# EAGLE board all_brds (EAGLE 5.10)
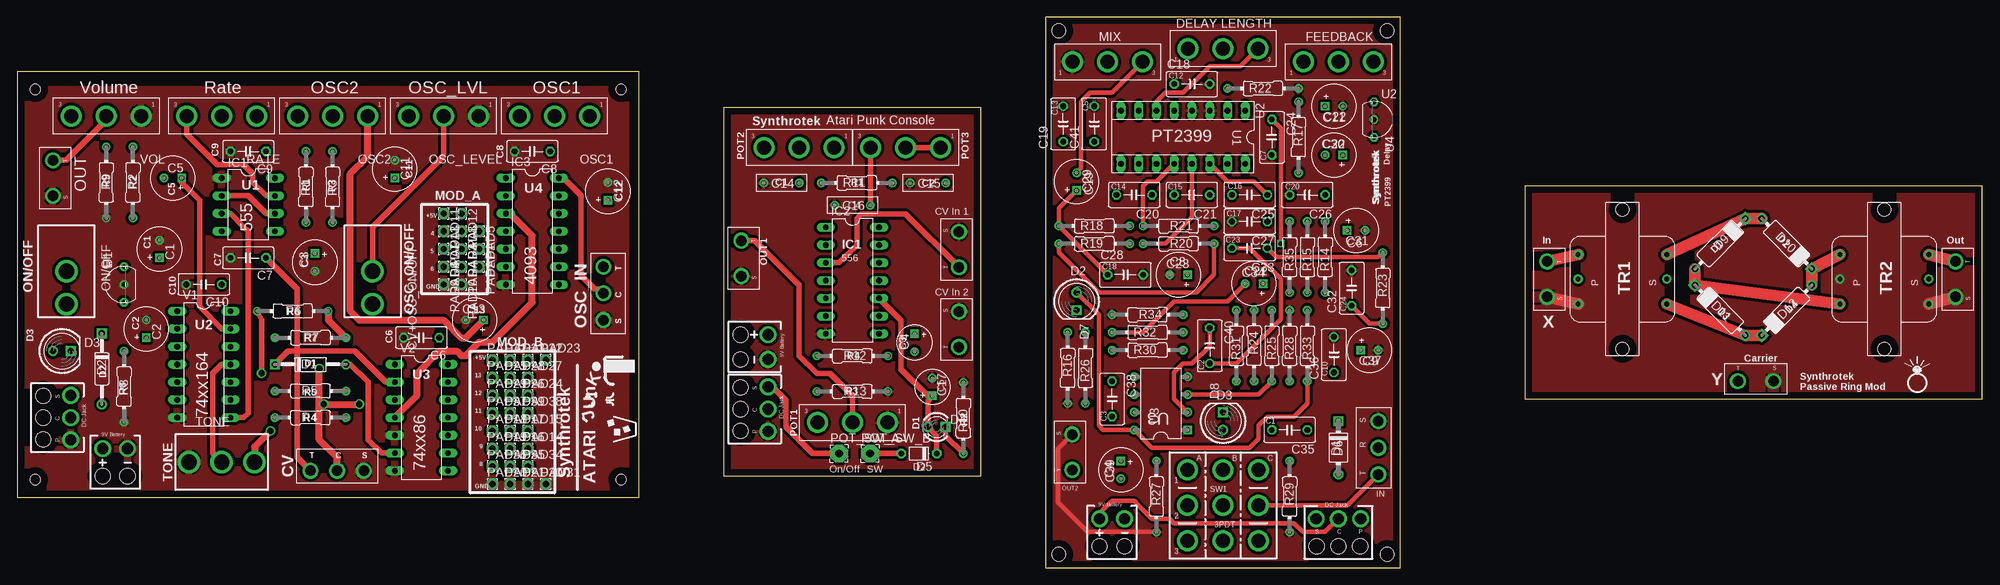
[diagram p0: board, top side]
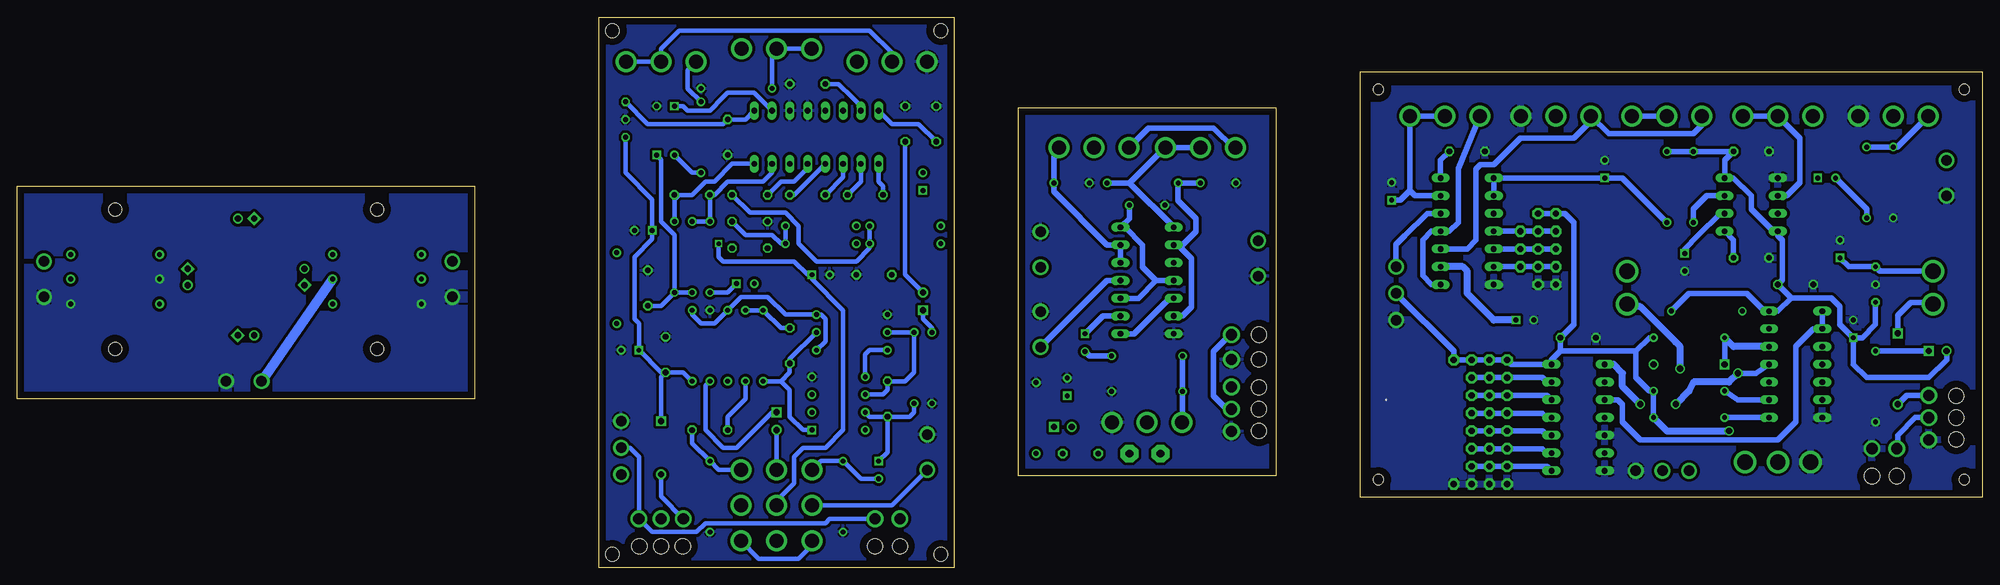
[diagram p1: board, bottom side, seen from below]

Size 281.05 x 78.74 mm. Coordinates in mm from the lower left corner, seen from the top.
Outline: 0,10.03 88.9,10.03 88.9,70.99 0,70.99 0,10.03
Outline: 101.03,13.14 137.86,13.14 137.86,65.85 101.03,65.84 101.03,13.14
Outline: 147.07,0 197.87,0 197.87,78.74 147.07,78.74 147.07,0
Outline: 215.65,24.13 281.05,24.13 281.05,54.61 215.65,54.61 215.65,24.13
Copper layers (1*16): Top 0.035mm / dielectric 1.5mm / Bottom 0.035mm
Design rules "default": minimum track width 10mil, minimum drill 24mil, track to track 8mil, track to pad 8mil, pad to pad 8mil, via to via 8mil, smd to smd 8mil, copper to edge 40mil, drill to drill 8mil, minimum pad ring 10mil, minimum via ring 8mil, stop-mask expansion 4mil, vias tented up to drill 0mil, thermal gap 10mil
Holes 1.5 mm at 2.54,68.45 86.36,68.45 86.36,12.57 2.54,12.57
Holes 2 mm at 195.96,1.91 195.96,76.84 148.97,76.84 148.97,1.91

## Footprints (pad centres in the part's own frame; a part is rotated, then mirrored left to right if it is on the bottom)
063_025 = drill 0.7 square: + -1.27,0 | drill 0.7 round: - 1.27,0
050_020_1 = drill 0.7 square: + -1.27,0 | drill 0.7 round: - 1.27,0
C050-030X075 = drill 0.813 octagon: 1 -2.54,0; 2 2.54,0
072X025 = drill 0.7 round: 1 -2.54,0; 2 2.54,0
C050-035X075 = drill 0.813 octagon: 1 -2.54,0; 2 2.54,0
MONO_JACK_W_SHUNT = drill 1.5 round: C 0,0; S 3.81,0; T -3.81,0
SPST_TOGGLE_SWITCH = drill 2.2 round: A 0,0; B 4.7,0
MONO_JACK = drill 1.5 round: SLEEVE 2.54,0; TIP -2.54,0
DO35-4 = drill 0.9 pad 1.422 round: A 5.08,0 | drill 0.9 pad 1.422 square: C -5.08,0
LED5MM = drill 0.9 round: A -1.27,0 | drill 0.9 square: K 1.27,0
LED3MM = drill 0.9 round: A -1.27,0 | drill 0.9 square: K 1.27,0
D-5 = drill 0.813 octagon: A 2.54,0; C -2.54,0
DO41-3 = drill 0.9 round: A 3.81,0 | drill 0.9 square: C -3.81,0
DO07 = drill 0.9 round: A 5.08,0 | drill 0.9 square: C -5.08,0
DIL08 = drill 0.813 long: 1 -3.81,-3.81; 2 -1.27,-3.81; 3 1.27,-3.81; 4 3.81,-3.81; 5 3.81,3.81; 6 1.27,3.81; 7 -1.27,3.81; 8 -3.81,3.81
DIL14 = drill 0.813 long: 1 -7.62,-3.81; 2 -5.08,-3.81; 3 -2.54,-3.81; 4 0,-3.81; 5 2.54,-3.81; 6 5.08,-3.81; 7 7.62,-3.81; 8 7.62,3.81; 9 5.08,3.81; 10 2.54,3.81; 11 0,3.81; 12 -2.54,3.81; 13 -5.08,3.81; 14 -7.62,3.81
STEREO_JACK = drill 1.5 round: R 0,0; S 3.81,0; T -3.81,0
POT = drill 2 round: 1 -5,0; 2 0,0; 3 5,0
1,6/0,9 = drill 0.914 pad 1.6 octagon: 1 0,0
2,54/1,1 = drill 1.118 pad 2.54 octagon: 1 0,0
R0207/4 = drill 0.7 round: 1 -5.08,0; 2 5.08,0
RESISTOR = drill 0.7 round: 1 -5.08,0; 2 5.08,0
3PDT = drill 2 round: A1 -5.08,5.08; A2 -5.08,0; A3 -5.08,-5.08; B1 0,5.08; B2 0,0; B3 0,-5.08; C1 5.08,5.08; C2 5.08,0; C3 5.08,-5.08
SPDT_TOGGLE_SWITCH = drill 2.2 round: A -4.7,0; B 4.7,0; C 0,0
42TM = drill 0.7 pad 1.3 round: 1 -3.556,-6.35; 2 0,-6.35; 3 3.556,-6.35; 4 3.556,6.35; 5 0,6.35; 6 -3.556,6.35 | hole 1.9: -9.982,0; 9.982,0
TO-92 = drill 0.7 octagon: 1 -2.54,0; 2 0,0; 3 2.54,0
SOCKET-16 = drill 0.813 long: 1 -8.89,-3.81; 2 -6.35,-3.81; 3 -3.81,-3.81; 4 -1.27,-3.81; 5 1.27,-3.81; 6 3.81,-3.81; 7 6.35,-3.81; 8 8.89,-3.81; 9 8.89,3.81; 10 6.35,3.81; 11 3.81,3.81; 12 1.27,3.81; 13 -1.27,3.81; 14 -3.81,3.81; 15 -6.35,3.81; 16 -8.89,3.81
DIL08' = drill 0.7 square: 1 -3.81,-3.81 | drill 0.7 round: 2 -1.27,-3.81; 3 1.27,-3.81; 4 3.81,-3.81; 5 3.81,3.81; 6 1.27,3.81; 7 -1.27,3.81; 8 -3.81,3.81
DC_JACK_OFFBOARD = drill 1.6 round: CONNECT 0,1.27; PIN 3.175,1.27; SLEEVE -3.175,1.27 | hole 2.2: -3.111,-2.667; 0,-2.667; 3.111,-2.667
9V_BATTERY = drill 1.6 round: 9V_BATTERY_+ -1.778,1.27; 9V_BATTERY_- 1.778,1.27 | hole 2.2: -1.778,-2.667; 1.778,-2.667

## Placement (x,y rotation side)
C1  100uF  [063_025]  20.32,45.59 90 top
C2  10uF  [063_025]  18.41,34.16 90 top
C3  0.2uF  [063_025]  42.55,43.69 270 top
C4  10uF  [050_020_1]  128.33,32.19 270 top
C5  1.0uF  [063_025]  22.23,55.75 180 top
C6  0.1uF  [C050-030X075]  57.78,32.89 180 top
C7  0.1uF  [C050-030X075]  33.02,44.32 180 top
C8  0.1uF  [C050-030X075]  73.66,59.56 180 top
C9  0.1uF  [C050-030X075]  33.02,59.56 180 top
C10  0.1uF  [C050-030X075]  26.67,40.51 180 top
C11  100uF  [063_025]  53.97,57.02 90 top
C12  2.2uF  [063_025]  84.45,53.85 90 top
C13  0.47uF  [063_025]  65.41,35.43 180 top
C14  0.01uF  [072X025]  109.28,55.05 180 top
C15  0.1uF  [072X025]  130.24,55.05 180 top
C16  0.1uF  [072X025]  119.44,51.88 180 top
C17  10uF  [050_020_1]  130.87,25.84 90 top
C18  0.1uF  [C050-035X075]  168.02,69.22 0 top
C19  0.1uF  [C050-035X075]  149.61,63.5 90 top
C20  82nF  [C050-035X075]  159.77,53.34 180 top
C21  82nF  [C050-035X075]  168.02,53.34 180 top
C22  47uF  [063_025]  188.34,66.04 0 top
C23  100uF  [063_025]  166.12,41.91 180 top
C24  0.1uF  [C050-035X075]  179.45,61.6 270 top
C25  560pF  [C050-035X075]  176.28,53.34 180 top
C26  560pF  [C050-035X075]  184.53,53.34 180 top
C27  3.3nF  [C050-035X075]  176.28,49.53 180 top
C28  0.01uF  [C050-035X075]  158.5,41.91 0 top
C29  4.7uF  [063_025]  151.51,55.24 90 top
C30  4.7uF  [063_025]  188.34,59.05 180 top
C31  47uF  [063_025]  191.52,48.26 0 top
C32  3.9n  [C050-035X075]  190.88,40.01 90 top
C33  4.7uF  [C050-035X075]  176.28,45.72 180 top
C34  10uF  [063_025]  176.91,40.64 180 top
C35  0.1uF  [C050-035X075]  181.99,19.68 180 top
C36  0.1uF  [C050-035X075]  188.34,30.48 90 top
C37  47uF  [063_025]  193.42,31.12 0 top
C38  1nF  [C050-035X075]  156.59,24.13 270 top
C39  1uF  [063_025]  157.86,13.97 270 top
C40  0.1uF  [C050-035X075]  170.56,31.75 270 top
C41  0.1uF  [C050-035X075]  154.05,63.5 90 top
CV  MONO_JACK_W_SHUNT  [MONO_JACK_W_SHUNT]  45.72,13.84 0 top
CV+OSC_ON/OFF  SPST_SWITCH  [SPST_TOGGLE_SWITCH]  50.8,42.42 270 top
CV_IN_1  MONO_JACK  [MONO_JACK]  134.68,34.1 90 top
CV_IN_2  MONO_JACK  [MONO_JACK]  134.68,45.53 90 top
D1  1N4148-4  [DO35-4]  41.91,29.08 0 top
D2  1N4148-4  [DO35-4]  12.06,28.45 270 top
D3  LED5MM  [LED5MM]  6.35,30.99 0 top
D4  LED3MM  [LED3MM]  131.51,20.13 0 top
D5  [D-5]  128.97,16.32 180 top
D6  1n4148  [DO41-3]  188.98,17.14 270 top
D7  LED5MM  [LED5MM]  151.51,38.1 270 top
D8  LED5MM  [LED5MM]  172.47,20.95 90 top
D9  [DO07]  243.59,46.35 225 top
D10  [DO07]  253.11,46.35 135 top
D11  [DO07]  243.59,36.83 315 top
D12  [DO07]  253.11,36.83 45 top
IC1  ICM7555  [DIL08]  33.02,51.94 270 top
IC2  LM556N  [DIL14]  119.44,41.08 270 top
IC3  4093N  [DIL14]  73.66,48.13 270 top
IN  STEREO_JACK  [STEREO_JACK]  194.69,17.14 90 top
ON/OFF  SPST_SWITCH  [SPST_TOGGLE_SWITCH]  6.98,42.42 270 top
OSC1  1M  [POT]  76.83,64.64 180 top
OSC2  1M  [POT]  45.08,64.64 180 top
OSC_IN  MONO_JACK_W_SHUNT  [MONO_JACK_W_SHUNT]  83.82,39.24 270 top
OSC_LEVEL  500k  [POT]  60.96,64.64 180 top
OUT  MONO_JACK  [MONO_JACK]  5.08,55.75 270 top
OUT1  MONO_JACK  [MONO_JACK]  103.57,44.26 270 top
OUT2  MONO_JACK  [MONO_JACK]  150.88,16.51 90 top
PAD1  [1,6/0,9]  66.04,45.59 270 top
PAD2  [1,6/0,9]  66.04,43.05 270 top
PAD3  [1,6/0,9]  63.5,45.59 270 top
PAD4  [1,6/0,9]  63.5,43.05 270 top
PAD5  [1,6/0,9]  66.04,48.13 270 top
PAD6  [1,6/0,9]  60.96,43.05 270 top
PAD7  [1,6/0,9]  60.96,45.59 270 top
PAD8  [1,6/0,9]  63.5,48.13 270 top
PAD9  [1,6/0,9]  60.96,40.51 270 top
PAD10  [1,6/0,9]  63.5,40.51 270 top
PAD11  [1,6/0,9]  60.96,50.67 270 top
PAD12  [1,6/0,9]  63.5,50.67 270 top
PAD13  [1,6/0,9]  60.96,48.13 270 top
PAD14  [1,6/0,9]  73.03,17.02 0 top
PAD15  [1,6/0,9]  73.03,19.56 0 top
PAD16  [1,6/0,9]  70.48,17.02 0 top
PAD17  [1,6/0,9]  70.48,19.56 0 top
PAD18  [1,6/0,9]  67.94,19.56 0 top
PAD19  [1,6/0,9]  67.94,17.02 0 top
PAD20  [1,6/0,9]  67.94,11.94 0 top
PAD21  [1,6/0,9]  70.48,11.94 0 top
PAD22  [1,6/0,9]  73.03,29.72 0 top
PAD23  [1,6/0,9]  75.56,29.72 0 top
PAD24  [1,6/0,9]  73.03,24.64 0 top
PAD25  [1,6/0,9]  67.94,27.18 0 top
PAD26  [1,6/0,9]  70.48,24.64 0 top
PAD27  [1,6/0,9]  73.03,27.18 0 top
PAD28  [1,6/0,9]  70.48,27.18 0 top
PAD29  [1,6/0,9]  67.94,24.64 0 top
PAD30  [1,6/0,9]  73.03,11.94 0 top
PAD31  [1,6/0,9]  75.56,11.94 0 top
PAD32  [1,6/0,9]  67.94,29.72 0 top
PAD33  [1,6/0,9]  70.48,29.72 0 top
PAD34  [1,6/0,9]  73.03,14.48 0 top
PAD35  [1,6/0,9]  70.48,14.48 0 top
PAD36  [1,6/0,9]  67.94,14.48 0 top
PAD37  [1,6/0,9]  67.94,22.1 0 top
PAD38  [1,6/0,9]  73.03,22.1 0 top
PAD39  [1,6/0,9]  70.48,22.1 0 top
POT1  [POT]  119.44,20.76 180 top
POT2  500k  [POT]  111.82,60.13 180 top
POT3  500k  [POT]  127.06,60.13 180 top
POT4  [POT]  172.47,74.29 0 top
POT5  [POT]  155.96,72.39 0 top
POT6  [POT]  188.98,72.39 0 top
POT_SW_A  [2,54/1,1]  117.54,16.32 0 top
POT_SW_B  [2,54/1,1]  121.98,16.32 0 top
R1  330  [R0207/4]  41.28,54.48 90 top
R2  10k  [R0207/4]  16.51,55.12 270 top
R3  100k  [R0207/4]  45.08,54.48 90 top
R4  10k  [R0207/4]  41.91,21.46 0 top
R5  1k  [R0207/4]  41.91,25.27 0 top
R6  1k  [R0207/4]  39.37,36.7 180 top
R7  1k  [R0207/4]  41.91,32.89 180 top
R8  1k  [R0207/4]  15.24,25.91 90 top
R9  10k  [R0207/4]  12.7,55.12 270 top
R10  1k  [R0207/4]  135.32,21.4 270 top
R11  1k  [R0207/4]  120.08,55.05 180 top
R12  10k  [R0207/4]  119.44,30.29 0 top
R13  4.7k  [R0207/4]  119.44,25.21 0 top
R14  10k  [RESISTOR]  187.07,44.45 270 top
R15  10k  [RESISTOR]  184.53,44.45 270 top
R16  470  [RESISTOR]  150.24,28.58 90 top
R17  3.3k  [RESISTOR]  183.26,61.6 90 top
R18  5.6k  [RESISTOR]  154.05,48.9 180 top
R19  10k  [RESISTOR]  154.05,46.35 180 top
R20  15k  [RESISTOR]  166.12,46.35 0 top
R21  10k  [RESISTOR]  166.12,48.9 0 top
R22  1k  [RESISTOR]  178.18,68.58 180 top
R23  15k  [RESISTOR]  195.33,40.01 90 top
R24  10k  [RESISTOR]  176.91,31.75 90 top
R25  1M  [RESISTOR]  179.45,31.75 270 top
R26  10k  [RESISTOR]  152.78,28.58 270 top
R27  1M  [RESISTOR]  162.94,10.16 90 top
R28  470  [RESISTOR]  181.99,31.75 270 top
R29  1M  [RESISTOR]  181.99,10.16 90 top
R30  1M  [RESISTOR]  161.67,31.12 180 top
R31  10k  [RESISTOR]  174.37,31.75 270 top
R32  10k  [RESISTOR]  161.67,33.66 180 top
R33  10k  [RESISTOR]  184.53,31.75 270 top
R34  10k  [RESISTOR]  161.67,36.2 0 top
R35  10k  [RESISTOR]  181.99,44.45 270 top
RATE  100k  [POT]  29.21,64.64 180 top
SW1  3PDT  [3PDT]  172.47,8.89 0 top
TONE  SPDT_SWITCH  [SPDT_TOGGLE_SWITCH]  29.21,15.11 0 top
TR1  42TM018  [42TM]  229.62,41.27 270 top
TR2  42TM018  [42TM]  267.08,41.27 270 top
U1  78L05ACZ  [TO-92]  15.24,40.51 90 top
U2  PT2399  [SOCKET-16]  166.75,61.6 180 top
U3  NE5532N  [DIL08']  163.58,23.49 90 top
U4  78L05ACZ  [TO-92]  194.06,64.13 270 top
U$1  DC_JACK_OFFBOARD  [DC_JACK_OFFBOARD]  106.11,22.67 270 top
U$2  9V_BATTERY_CLIP  [9V_BATTERY]  106.11,31.56 270 top
U$3  DC_JACK_OFFBOARD  [DC_JACK_OFFBOARD]  188.98,5.71 0 top
U$4  9V_BATTERY_CLIP  [9V_BATTERY]  156.59,5.71 0 top
U$5  MONO_JACK  [MONO_JACK]  277.24,41.27 270 top
U$6  DC_JACK_OFFBOARD  [DC_JACK_OFFBOARD]  6.35,21.46 270 top
U$7  9V_BATTERY_CLIP  [9V_BATTERY]  13.97,15.75 0 top
U$8  MONO_JACK  [MONO_JACK]  218.82,41.27 270 top
U$9  MONO_JACK  [MONO_JACK]  248.67,26.67 0 top
V1  74164N  [DIL14]  26.67,29.08 270 top
V2  7486N  [DIL14]  57.78,21.46 270 top
VOL  100kA  [POT]  12.7,64.64 180 top

## Library data of the parts
C1-C5 C11-C13 C17 C22 C23 C29-C31 C34 C37 C39 = gm-caps-electro-pol
C6-C10 C18-C21 C24-C28 C32 C33 C35 C36 C38 C40 C41 = resistor
C14-C16 = gm-caps-film-box
CV CV+OSC_ON/OFF CV_IN_1 CV_IN_2 IN ON/OFF OSC1 OSC2 OSC_IN OSC_LEVEL OUT OUT1 OUT2 POT1-POT6 R14-R35 RATE SW1 TONE U1 U4 U$1-U$9 VOL = 00_steve
D1-D4 D6-D12 = gm-diodes
D5 = diode
IC1 = maxim
IC2 = linear
IC3 = 40xx
PAD1-PAD39 POT_SW_A POT_SW_B = wirepad
R1-R13 = gm-resistors
TR1 TR2 = trafo-xicon
U2 = ic-package
U3 = gm-ics
V1 V2 = 74ttl-din

## Nets
5V: C2.+ C6.1 C8.1 C9.1 C10.1 D3.A IC1.4 IC1.8 IC3.14 OSC_IN.C PAD11.1 PAD12.1 PAD22.1 PAD23.1 PAD32.1 PAD33.1 R1.2 R3.2 R4.2 R5.2 R6.1 R7.1 TONE.B U1.1 V1.14 V2.14
9V: C31.+ C36.1 C37.+ C41.1 D6.C D7.A R33.2 U3.8 U4.3
+9V: C1.+ ON/OFF.A U1.3
+9V1: C16.1 C17.+ D4.A D5.C IC2.4 IC2.10 IC2.14 POT2.3 POT3.3
BYPASS: SW1.A3 SW1.C3
C3: C4.+ IC2.9
C5*: C19.1 U2.8
DELAY_IN: C33.2 C40.2 R31.2 R32.1 U3.1
DELAY_OUT: C34.- C38.1 R26.1 R32.2 U3.6
DELAY_OUT_UNBUFFERED: R30.2 U3.5
GND: C1.- C2.- C3.- C6.2 C7.2 C8.2 C9.2 C10.2 C11.- C12.- C13.- CV.S IC1.1 IC3.7 OSC_IN.S OSC_LEVEL.1 OUT.SLEEVE PAD9.1 PAD10.1 PAD20.1 PAD21.1 PAD30.1 PAD31.1 R8.1 R9.2 TONE.A U1.2 U$6.PIN U$7.9V_BATTERY_- V1.7 V2.5 V2.7 VOL.1
GND1: C14.2 C15.2 C16.2 C17.- CV_IN_1.SLEEVE CV_IN_2.SLEEVE IC2.7 OUT1.SLEEVE POT1.1 R10.1 R13.2 U$1.PIN U$2.9V_BATTERY_-
GND2: C18.2 C19.2 C22.- C23.- C24.2 C27.2 C28.2 C31.- C32.2 C36.2 C37.- C41.2 IN.S OUT2.SLEEVE POT5.1 R16.1 R22.1 R27.1 R28.1 R29.1 R34.1 U2.3 U2.4 U3.4 U4.2
GND3: TR1.3 TR2.2 TR2.4 U$5.SLEEVE U$8.SLEEVE U$9.SLEEVE
JACKSW: IN.R U$3.PIN U$4.9V_BATTERY_-
N$1: C3.+ IC1.2 IC1.6 RATE.1 RATE.2
N$2: U$6.CONNECT U$7.9V_BATTERY_+
N$3: IC1.3 R4.1 V1.8
N$4: IC1.7 R1.1 RATE.3
N$5: R5.1 V1.9
N$6: PAD15.1 PAD17.1 PAD18.1 V2.10
N$7: C7.1 CV.T IC1.5
N$8: V1.1 V1.2 V2.3
N$9: R6.2 TONE.C V1.11 V2.1
N$10: D1.C R7.2 V1.12 V2.2
N$11: C5.+ V1.13
N$12: C5.- R2.2
N$13: R2.1 R9.1 VOL.3
N$14: OUT.TIP VOL.2
N$15: IC3.12 OSC_IN.T
N$16: C12.+ IC3.13 OSC1.1 OSC1.2
N$17: CV+OSC_ON/OFF.B CV.C
N$18: C11.+ IC3.1 IC3.2 R3.1
N$19: IC3.3 V2.4
N$20: D1.A V2.6
N$21: IC3.8 IC3.11 OSC1.3
N$22: D3.K R8.2
N$23: PAD14.1 PAD16.1 PAD19.1 V2.9
N$24: IC3.4 PAD5.1 PAD8.1 PAD13.1
N$25: IC3.6 PAD2.1 PAD4.1 PAD6.1
N$26: IC3.5 PAD1.1 PAD3.1 PAD7.1
N$27: PAD34.1 PAD35.1 PAD36.1 V2.8
N$28: PAD37.1 PAD38.1 PAD39.1 V2.11
N$29: PAD25.1 PAD27.1 PAD28.1 V2.13
N$30: PAD24.1 PAD26.1 PAD29.1 V2.12
N$31: CV+OSC_ON/OFF.A OSC_LEVEL.2
N$32: C13.+ IC3.9 OSC2.1 OSC2.2
N$33: D4.K R10.2
N$34: D2.A U$6.SLEEVE
N$35: D2.C ON/OFF.B
N$36: IC3.10 OSC2.3 OSC_LEVEL.3
N$37: C14.1 IC2.2 IC2.6 R11.2
N$38: IC2.1 POT2.1 POT2.2 R11.1
N$39: IC2.5 IC2.8
N$40: C15.1 IC2.12 IC2.13 POT3.1 POT3.2
N$41: C4.- R12.2
N$42: POT1.3 R12.1 R13.1
N$43: CV_IN_1.TIP IC2.11
N$44: OUT1.TIP POT1.2
N$45: U$1.CONNECT U$2.9V_BATTERY_+
N$46: POT_SW_A.1 U$1.SLEEVE
N$47: CV_IN_2.TIP IC2.3
N$48: D5.A POT_SW_B.1
N$49: C18.1 U2.7
N$50: C20.2 U2.9
N$51: C20.1 U2.10
N$52: C21.1 R21.1 U2.12
N$53: C25.2 R20.1 U2.13
N$54: C26.2 R15.1 R35.1 U2.15
N$55: C26.1 R14.1 U2.16
N$56: C21.2 U2.11
N$57: C27.1 R19.2 R20.2 R21.2
N$58: C28.1 C29.+ R18.2
N$59: C29.- POT5.3
N$60: C30.+ C32.1 R14.2 R15.2 R23.1
N$61: C30.- R17.1
N$62: D7.K R16.2
N$63: D6.A U$3.SLEEVE
N$64: C33.1 R23.2
N$65: C34.+ R35.2
N$66: C22.+ U2.2
N$67: C25.1 R18.1 R19.1 U2.14
N$68: C40.1 R24.2 R31.1 U3.2
N$69: C38.2 C39.+ R26.2 U3.7
N$70: C39.- R27.2 SW1.A1
N$71: D8.A SW1.B1
N$72: D8.K R28.2
N$73: POT5.2 POT6.2 POT6.3
N$74: POT6.1 R17.2
N$75: U$3.CONNECT U$4.9V_BATTERY_+
N$76: OUT2.TIP SW1.A2
N$77: IN.T SW1.C2
N$78: C35.1 R29.2 SW1.C1
N$79: C35.2 R24.1
N$80: R25.2 U3.3
N$81: POT4.1 POT4.2 R22.2
N$82: POT4.3 U2.6
N$83: D9.C D10.A TR1.6
N$84: D10.C D12.A TR2.1
N$85: D11.A D12.C TR1.4
N$86: D9.A D11.C TR2.3
N$87: TR1.1 U$8.TIP
N$88: TR2.6 U$5.TIP
N$89: TR1.5 U$9.TIP
VA: C23.+ C24.1 SW1.B2 U2.1 U4.1
VREF: R25.1 R30.1 R33.1 R34.2

## Tracks (layer width: path | path; a pad name or v marks a point on that pad's centre or on a via)
5V  (via drill 0.9)
  Top 0.813: IC3.14 78.11,55.75 80.64,53.21 80.64,41.78 82.55,39.88 83.19,39.88 OSC_IN.C
  Top 1.016: TONE.B 33.91,17.27 v36.19,19.56 | R6.1 44.45,35.43 R7.1
  Bottom 0.813: U1.1 15.24,34.8 17.15,32.89 C2.+ | D3.A 5.08,29.72 7.62,27.18 16.51,27.18 18.41,29.08 C2.+ | C2.+ 20.32,34.8 20.32,37.34 21.59,38.61 27.3,38.61 | 27.3,38.61 C10.1 28.58,41.15 28.58,46.86 29.21,47.5 IC1.4 29.84,48.13 33.02,51.31 33.02,53.21 35.56,55.75 IC1.8 36.83,58.29 C9.1 R1.2 R3.2 | 27.3,38.61 29.21,36.7 V1.14 31.12,36.7 33.66,39.24 41.91,39.24 R6.1 | 61.59,29.72 V2.14 67.31,29.08 PAD32.1 PAD33.1 PAD22.1 PAD23.1 75.56,30.99 OSC_IN.C | 60.33,30.99 61.59,29.72 | 60.33,30.99 C6.1 58.42,34.8 58.42,49.4 59.69,50.67 60.33,50.67 PAD12.1 PAD11.1 | IC3.14 77.47,58.29 C8.1 | R7.1 47.62,32.89 49.53,30.99 | 49.53,30.99 49.53,27.18 47.62,25.27 R5.2 R4.2 | 49.53,30.99 60.33,30.99 | 60.33,30.99 61.59,29.72
  Bottom 1.016: v36.19,19.56 45.08,19.56 R4.2
9V
  Top 0.61: R33.2 184.53,23.49 182.63,21.59 178.82,21.59 177.55,20.32 177.55,18.41 176.28,17.14 162.31,17.14 U3.8 155.32,19.68 154.69,20.32 154.69,36.2 D7.A
  Bottom 0.61: D6.C 188.98,27.3 C36.1 | C36.1 185.8,27.94 R33.2 | C36.1 188.98,27.94 C37.+ 192.15,34.92 192.79,35.56 192.79,44.45 190.25,46.99 C31.+ 190.25,52.71 194.06,56.51 U4.3 | C41.1 154.05,41.91 D7.A
+9V
  Bottom 0.813: ON/OFF.A 14.6,42.42 U1.3 19.05,43.05 C1.+
+9V1
  Top 0.813: D5.C 131.51,18.86 D4.A 130.24,23.94 C17.+ 130.24,24.58 126.43,28.38 126.43,35.37 IC2.10 | POT3.3 122.06,51.96 C16.1
  Bottom 0.813: 118.17,41.08 IC2.4 | 118.17,41.08 120.71,38.54 IC2.10 | 118.17,41.08 120.08,42.99 120.08,46.16 122.62,48.7 IC2.14 121.98,49.97 C16.1 | POT2.3 107.12,60.13 109.92,62.93 119.27,62.93 POT3.3
BYPASS
  Bottom 0.61: SW1.A3 167.39,3.18 169.29,1.27 175.01,1.27 SW1.C3
C3
  Bottom 0.813: IC2.9 125.79,36 C4.+
C5*
  Bottom 0.61: C19.1 152.15,63.5 155.96,63.5 U2.8
DELAY_IN
  Top 0.61: C40.2 174.37,29.21 180.72,35.56 180.72,41.27 176.28,45.72 C33.2
  Bottom 0.61: U3.1 168.66,19.68 170.56,21.59 170.56,25.4 171.83,26.67 | 171.83,26.67 R31.2 171.83,26.67 | 171.83,26.67 170.56,27.94 C40.2 170.56,29.84 R32.1
DELAY_OUT
  Top 0.61: R32.2 161.04,33.66 165.48,38.1 173.1,38.1 C34.-
  Bottom 0.61: U3.6 157.23,24.77 156.59,25.4 C38.1 154.05,26.67 152.78,27.94 R26.1 R32.2
DELAY_OUT_UNBUFFERED
  Bottom 0.61: R30.2 159.13,31.12 159.77,30.48 U3.5
GND
  pour Top (isolate 0.406): 0,68.45 87,68.45 87,10.03 0,10.03
  pour Bottom (isolate 0.406): 0,68.45 87,68.45 87,10.03 0,10.03
GND1
  pour Bottom (isolate 0.406): 101.03,65.85 137.86,65.85 137.86,13.14 101.03,13.14
  pour Top (isolate 0.406): 101.03,65.85 137.86,65.85 137.86,13.14 101.03,13.14
GND2
  Top 0.61: R27.1 153.1,5.08 148.84,9.34 148.84,17.02 OUT2.SLEEVE
  pour Bottom (isolate 0.406): 147.07,78.74 197.87,78.74 197.87,0 147.07,0
  pour Top (isolate 0.406): 147.07,78.74 197.87,78.74 197.87,0 147.07,0
GND3
  Top 1.676: U$8.SLEEVE TR1.3 | TR2.4 U$5.SLEEVE
  pour Bottom (isolate 0.406): 215.65,54.61 281.05,54.61 281.05,24.13 215.65,24.13
  pour Top (isolate 0.406): 215.65,54.61 281.05,54.61 281.05,24.13 215.65,24.13
JACKSW
  Bottom 0.61: U$4.9V_BATTERY_- 164.85,6.98 165.48,6.35 182.63,6.35 183.9,5.08 190.25,5.08 U$3.PIN 192.15,15.88 193.42,17.14 IN.R
N$1
  Top 0.813: IC1.6 35.56,50.67 33.02,53.21 IC1.2
  Bottom 0.813: RATE.1 RATE.2 26.04,61.47 26.04,55.12 27.94,53.21 IC1.2 | IC1.6 37.47,50.67 40.64,47.5 42.55,45.59 C3.+
N$2
  Bottom 0.813: U$6.CONNECT 9.52,21.46 12.06,18.92 12.06,17.14 U$7.9V_BATTERY_+
N$3
  Top 0.813: IC1.3 30.48,50.67 32.38,48.77 33.02,48.13 33.02,22.1 32.38,21.46 V1.8
  Bottom 0.813: V1.8 R4.1
N$4
  Top 0.813: RATE.3 24.21,62.02 28.58,57.66 32.38,57.66 33.66,56.39 33.66,55.12 35.56,53.21 IC1.7
  Bottom 0.813: R1.1 41.28,51.31 39.37,53.21 IC1.7
N$5
  Bottom 0.813: V1.9 34.92,24 R5.1
N$6
  Bottom 0.813: PAD15.1 PAD17.1 PAD18.1 62.86,19.56 62.23,18.92 V2.10
N$7
  Top 0.813: C7.1 40,39.88 40,15.75 CV.T
  Bottom 0.813: C7.1 35.56,46.86 IC1.5
N$8
  Bottom 0.813: V1.1 V1.2 24.13,34.16 26.67,31.62 26.67,20.83 29.21,18.29 48.89,18.29 51.44,20.83 51.44,23.37 52.07,24 V2.3
N$9  (via drill 0.9)
  Top 0.813: R6.2 34.92,35.43 34.92,34.8 34.92,34.16 34.92,32.89 v34.92,27.81 | V1.11 29.21,29.08 27.94,27.81 27.94,16.38 TONE.C
  Top 1.016: v43.81,23.37 v48.89,23.37
  Bottom 0.813: v34.92,27.81 32.38,27.81 V1.11
  Bottom 1.016: v34.92,27.81 36.19,26.54 41.28,26.54 41.91,25.27 v43.81,23.37 | v48.89,23.37 50.8,25.27 51.44,25.91 51.44,27.81 52.7,29.08 V2.1
N$10
  Top 0.813: V2.2 52.7,26.54 48.26,30.99 38.73,30.99 D1.C
  Bottom 0.813: R7.2 D1.C
  Bottom 1.016: V1.12 35.56,31.62 R7.2
N$11
  Top 0.813: C5.+ 23.49,55.12 26.04,52.58 26.04,37.34 29.21,34.16 V1.13
N$12
  Bottom 0.813: R2.2 16.51,51.31 C5.-
N$13
  Bottom 0.813: R2.1 R9.1 12.15,60.2 VOL.3
N$14
  Top 0.813: VOL.2 12.7,64.01 6.98,58.29 OUT.TIP
N$15
  Bottom 0.813: IC3.12 79.38,50.67 82.55,47.5 83.82,46.23 OSC_IN.T
N$16
  Bottom 0.813: OSC1.2 OSC1.1 81.83,53.93 | 81.83,53.93 83.19,52.58 C12.+ | IC3.13 81.12,53.21 81.83,53.93
N$17  (via drill 0.9)
  Top 1.016: CV.C 45.72,15.75 43.18,18.29 v43.18,28.45
  Bottom 1.016: v43.18,28.45 43.18,31.62 43.81,32.26 48.89,37.34 50.42,37.34 CV+OSC_ON/OFF.B
N$18
  Bottom 0.813: R3.1 51.44,55.75 C11.+ 68.58,55.75 IC3.1 IC3.2
N$19
  Top 1.016: IC3.3 70.48,50.67 73.66,47.5 73.66,37.97 71.12,35.43 67.94,32.26 66.04,32.26 64.14,30.35 63.5,30.35 62.86,30.99 60.33,30.99 57.15,27.81 57.15,24.64 V2.4
N$20
  Top 0.813: D1.A 47.62,29.08 50.17,26.54 50.17,18.29 52.07,16.38 V2.6
N$21
  Bottom 0.813: IC3.8 78.74,40.51 80.01,41.78 80.01,46.86 78.74,48.13 IC3.11 76.2,48.13 74.93,49.4 74.93,57.1 OSC1.3
N$22
  Bottom 0.813: D3.K R8.2
N$23
  Bottom 0.813: PAD16.1 PAD19.1 62.86,17.02 62.23,16.38 V2.9 | PAD16.1 PAD14.1 PAD16.1
N$24
  Bottom 0.813: IC3.4 67.31,48.13 PAD5.1 PAD8.1 PAD13.1
N$25
  Bottom 0.813: IC3.6 66.67,43.05 PAD2.1 PAD4.1 PAD6.1
N$26
  Bottom 0.813: PAD7.1 PAD3.1 PAD1.1 66.67,45.59 IC3.5
N$27
  Bottom 0.813: PAD35.1 PAD36.1 62.23,14.48 V2.8 | PAD35.1 PAD34.1 PAD35.1
N$28
  Bottom 0.813: V2.11 62.23,21.46 62.86,22.1 PAD37.1 PAD39.1 PAD38.1
N$29
  Bottom 0.813: V2.13 62.23,26.54 62.86,27.18 PAD25.1 PAD28.1 PAD27.1
N$30
  Bottom 0.813: PAD24.1 PAD26.1 PAD29.1 62.23,24.64 V2.12
N$31
  Top 0.813: OSC_LEVEL.2 60.96,58.93 50.8,48.77 CV+OSC_ON/OFF.A
N$32
  Top 1.016: OSC2.1 50.08,58.85 47.62,56.39 47.62,36.7 48.89,35.43 60.96,35.43 63.5,32.89 64.14,32.89 C13.+
  Bottom 0.813: OSC2.1 OSC2.2
  Bottom 1.016: C13.+ 69.85,35.43 73.66,39.24 73.66,42.42 74.3,43.05 IC3.9
N$33
  Top 0.813: D4.K 132.78,18.86 R10.2
N$34
  Bottom 0.813: D2.A 10.8,24.64 U$6.SLEEVE
N$35
  Bottom 0.813: D2.C 12.06,36.07 10.16,37.97 7.24,37.97 ON/OFF.B
N$36
  Bottom 0.813: OSC2.3 40.08,63.29 41.28,62.1 53.42,62.1 OSC_LEVEL.3 55.96,63.93 58.42,61.47 66.04,61.47 69.85,57.66 71.75,57.66 72.39,57.02 72.39,46.86 73.66,45.59 IC3.10
N$37
  Bottom 0.813: C14.1 R11.2 115,52.51 112.46,49.97 112.46,48.07 113.73,46.8 114.36,46.16 IC2.2 115,46.16 113.09,44.26 113.09,37.27 113.73,36.64 114.36,36 IC2.6
N$38
  Bottom 0.813: POT2.2 POT2.1 116.9,60.13 121.98,55.05 | 121.98,55.05 R11.1 121.98,55.05 | IC2.1 121.98,55.05
N$39
  Bottom 0.813: IC2.8 121.35,33.47 116.27,38.54 IC2.5
N$40
  Top 0.813: POT3.1 POT3.2
  Bottom 0.813: POT3.1 132.78,59.42 C15.1 132.78,53.79 125.16,46.16 IC2.13 IC2.12
N$41
  Bottom 0.813: C4.- 127.7,30.29 R12.2
N$42
  Bottom 0.813: R12.1 R13.1 114.36,20.84 POT1.3
N$43
  Bottom 0.813: CV_IN_1.TIP 125.16,41.08 IC2.11
N$44
  Top 0.813: OUT1.TIP 105.47,46.8 111.82,40.45 111.82,30.29 114.36,27.75 116.27,27.75 119.44,24.58 POT1.2
N$45
  Bottom 0.813: U$2.9V_BATTERY_+ 107.51,33.34 109.92,30.92 109.92,24.58 108.65,23.3 108.01,22.67 U$1.CONNECT
N$46
  Top 0.813: U$1.SLEEVE 108.01,25.84 109.92,23.94 109.92,20.13 113.73,16.32 POT_SW_A.1
N$47
  Top 0.813: IC2.3 117.54,43.62 120.08,46.16 120.08,49.97 120.71,50.61 127.06,50.61 CV_IN_2.TIP
N$48
  Top 0.813: POT_SW_B.1 D5.A
N$49
  Bottom 0.61: U2.7 160.4,66.04 161.67,67.31 163.58,69.22 C18.1
N$50
  Bottom 0.61: U2.9 157.86,55.24 157.23,54.61 C20.2
N$51
  Bottom 0.61: U2.10 160.4,55.24 C20.1
N$52
  Top 0.61: U2.12 162.94,55.24 161.67,55.24 161.04,54.61 R21.1
  Bottom 0.61: U2.12 169.93,53.34 C21.1
N$53
  Top 0.61: R20.1 164.21,46.35 168.02,50.16 168.02,57.15 U2.13
  Bottom 0.61: U2.13 168.02,57.15 169.93,55.24 171.83,55.24 C25.2
N$54
  Bottom 0.61: R15.1 R35.1 C26.2 181.36,53.34 179.45,55.24 174.37,55.24 173.1,56.51 U2.15
N$55
  Bottom 0.61: 187.07,52.71 R14.1 | 187.07,52.71 C26.1 | U2.16 178.82,57.79 181.36,55.24 182.63,55.24 183.9,53.98 184.53,53.34 186.44,53.34 187.07,52.71
N$56
  Bottom 0.61: U2.11 162.94,55.88 C21.2
N$57
  Top 0.61: R19.2 148.97,45.09 154.69,39.37 168.66,39.37 171.2,41.91 R20.2
  Bottom 0.61: R21.2 R20.2 171.83,46.35 173.1,47.62 176.91,47.62 C27.1
N$58
  Top 0.61: C29.+ 148.97,51.44 R18.2 C28.1
N$59
  Top 0.61: POT5.3 160.96,72.31 156.59,67.94 153.42,67.94 152.15,66.68 152.15,57.15 C29.-
N$60
  Top 0.61: R23.1 193.42,34.92 C32.1
  Bottom 0.61: C32.1 188.98,37.47 R14.2 | R15.2 R14.2 | R14.2 187.07,47.62 188.98,49.53 188.98,58.42 C30.+
N$61
  Bottom 0.61: R17.1 184.53,56.51 C30.-
N$62
  Bottom 0.61: R16.2 150.24,34.29 150.88,34.92 151.51,35.56 D7.K
N$63
  Bottom 0.61: U$3.SLEEVE 188.98,10.16 D6.A
N$64
  Top 0.61: C33.1 180.09,44.45 194.69,44.45 R23.2
N$65
  Bottom 0.61: R35.2 179.45,39.37 C34.+
N$66
  Bottom 0.61: C22.+ 185.8,66.04 185.17,65.41 181.99,65.41 180.09,67.31 179.45,67.94 175.64,67.94 U2.2
N$67
  Top 0.61: U2.14 173.1,55.24 176.91,55.24 C25.1
  Bottom 0.61: R18.1 R19.1 159.13,45.72 161.04,43.81 166.75,43.81 169.29,46.35 169.29,48.9 171.2,50.8 176.28,50.8 C25.1
N$68
  Top 0.61: U3.2 165.48,24.13 165.48,27.94 166.75,29.21 168.02,29.21 170.56,31.75 C40.1
  Bottom 0.61: C40.1 171.83,34.29 R31.1 R24.2
N$69
  Bottom 0.61: C39.+ 156.59,16.51 C38.2 | C38.2 159.13,21.59 U3.7 | C38.2 153.42,21.59 152.78,22.23 R26.2
N$70
  Bottom 0.61: C39.- 160.4,12.7 R27.2 166.12,15.24 SW1.A1
N$71
  Bottom 0.61: SW1.B1 D8.A
N$72
  Bottom 0.61: D8.K 173.1,22.23 178.18,17.14 180.09,17.14 182.63,19.68 182.63,26.04 R28.2
N$73
  Bottom 0.61: POT5.2 155.96,73.66 159.13,76.84 186.44,76.84 188.98,74.29 POT6.2 POT6.3
N$74
  Bottom 0.61: R17.2 185.17,68.58 185.17,71.2 POT6.1
N$75
  Top 0.61: U$4.9V_BATTERY_+ 154.81,7.75 156.59,9.52 159.77,9.52 160.4,8.89 162.31,6.98 164.85,6.98 165.48,6.35 182.63,6.35 183.9,5.08 187.07,5.08 U$3.CONNECT
N$76
  Bottom 0.61: SW1.A2 155.96,8.89 OUT2.TIP
N$77
  Top 0.61: SW1.C2 190.25,8.89 IN.T
N$78
  Bottom 0.61: SW1.C1 180.72,13.97 R29.2 184.53,17.78 C35.1
N$79
  Bottom 0.61: C35.2 179.45,21.59 176.91,24.13 R24.1
N$80
  Top 0.61: U3.3 177.55,24.77 R25.2
N$81
  Bottom 0.61: R22.2 173.1,73.66 POT4.2 POT4.1
N$82
  Top 0.61: U2.6 162.94,66.68 164.21,67.94 166.75,67.94 168.66,69.85 170.56,71.75 174.93,71.75 POT4.3
N$83
  Top 1.676: TR1.6 D9.C D10.A
N$84
  Top 1.676: TR2.1 D10.C D12.A
N$85
  Top 1.676: TR1.4 D11.A D12.C
N$86
  Top 1.676: D9.A D11.C TR2.3
N$87
  Top 1.676: U$8.TIP TR1.1
N$88
  Top 1.676: TR2.6 U$5.TIP
N$89
  Bottom 1.422: U$9.TIP TR1.5
VA  (via drill 0.6)
  Top 0.61: v180.72,46.35 180.72,59.69 180.72,62.87 C24.1
  Bottom 0.61: U4.1 190.88,63.5 180.09,63.5 C24.1 176.91,64.13 U2.1 | SW1.B2 172.47,9.52 169.93,12.07 169.93,15.88 168.66,17.14 165.48,17.14 162.94,19.68 162.94,36.83 167.39,41.27 C23.+ 168.02,41.91 169.93,43.81 180.09,43.81 180.72,44.45 v180.72,46.35
VREF
  Bottom 0.61: R30.1 165.48,32.38 165.48,35.56 166.12,36.2 R34.2 171.2,36.2 173.74,38.73 177.55,38.73 R25.1 181.36,34.92 183.26,34.92 183.9,35.56 184.53,36.2 R33.1

## Text on the board
tPlace: DELAY LENGTH | MIX | FEEDBACK | C12 | Volume | Rate | OSC2 | OSC_LVL | OSC1 | U2 | C5 | Synthrotek | C13 | Atari Punk Console | C11 | U1 | C9 | C8 | PT2399 | C22 | C7 | Delay | R2 | R1 | R3 | C11 | C12 | C1 | R9 | R1 | C2 | C14 | C15 | C16 | C20 | C5 | U1 | U4 | C19 | MOD_A | Synthrotek | Synthrotek | C4 | Synthrotek | PT2399 | CV In 1 | C17 | +5V | 555 | C1 | 4 | C23 | In | D2 | Out | IC1 | C6 | C7 | C3 | 5 | D1 | 556 | C8 | TR1 | TR2 | U5 | 6 | C18 | C10 | D2 | C21 | 4093 | ON/OFF | GND | CV In 2 | C13 | R6 | OSC_ON/OFF | C24 | D4 | C2 | D3 | D3 | X | U2 | C6 | R7 | MOD_B | C3 | Carrier | D1 | +5V | R4 | C2 | C9 | D2 | 13 | C10 | U3 | Synthrotek | K | C5 | Y | Passive Ring Mod | R8 | R5 | 12 | n | R3 | D3 | 11 | U | R2 | U3 | 74xx164 | J | R4 | C3 | C1 | 10 | D1 | 9 | D1 | 8 | D2 | 74xx86 | On/Off | SW | TONE | Synthrotek | C4 | GND | ATARI